# Altium PCB 330 下灯位.PcbDoc (part 5 of 5)
Units mm, origin at the board's own origin, x right, y up, seen from the top; angles counter-clockwise.
Board outline 301.8 x 92.3 mm, 2 copper layers (Top, Bottom), stack 0.323 mm thick; 298 components, 203 nets, 2190 pads, 758 vias.
Unrouted connection lines stored in the file: 36.
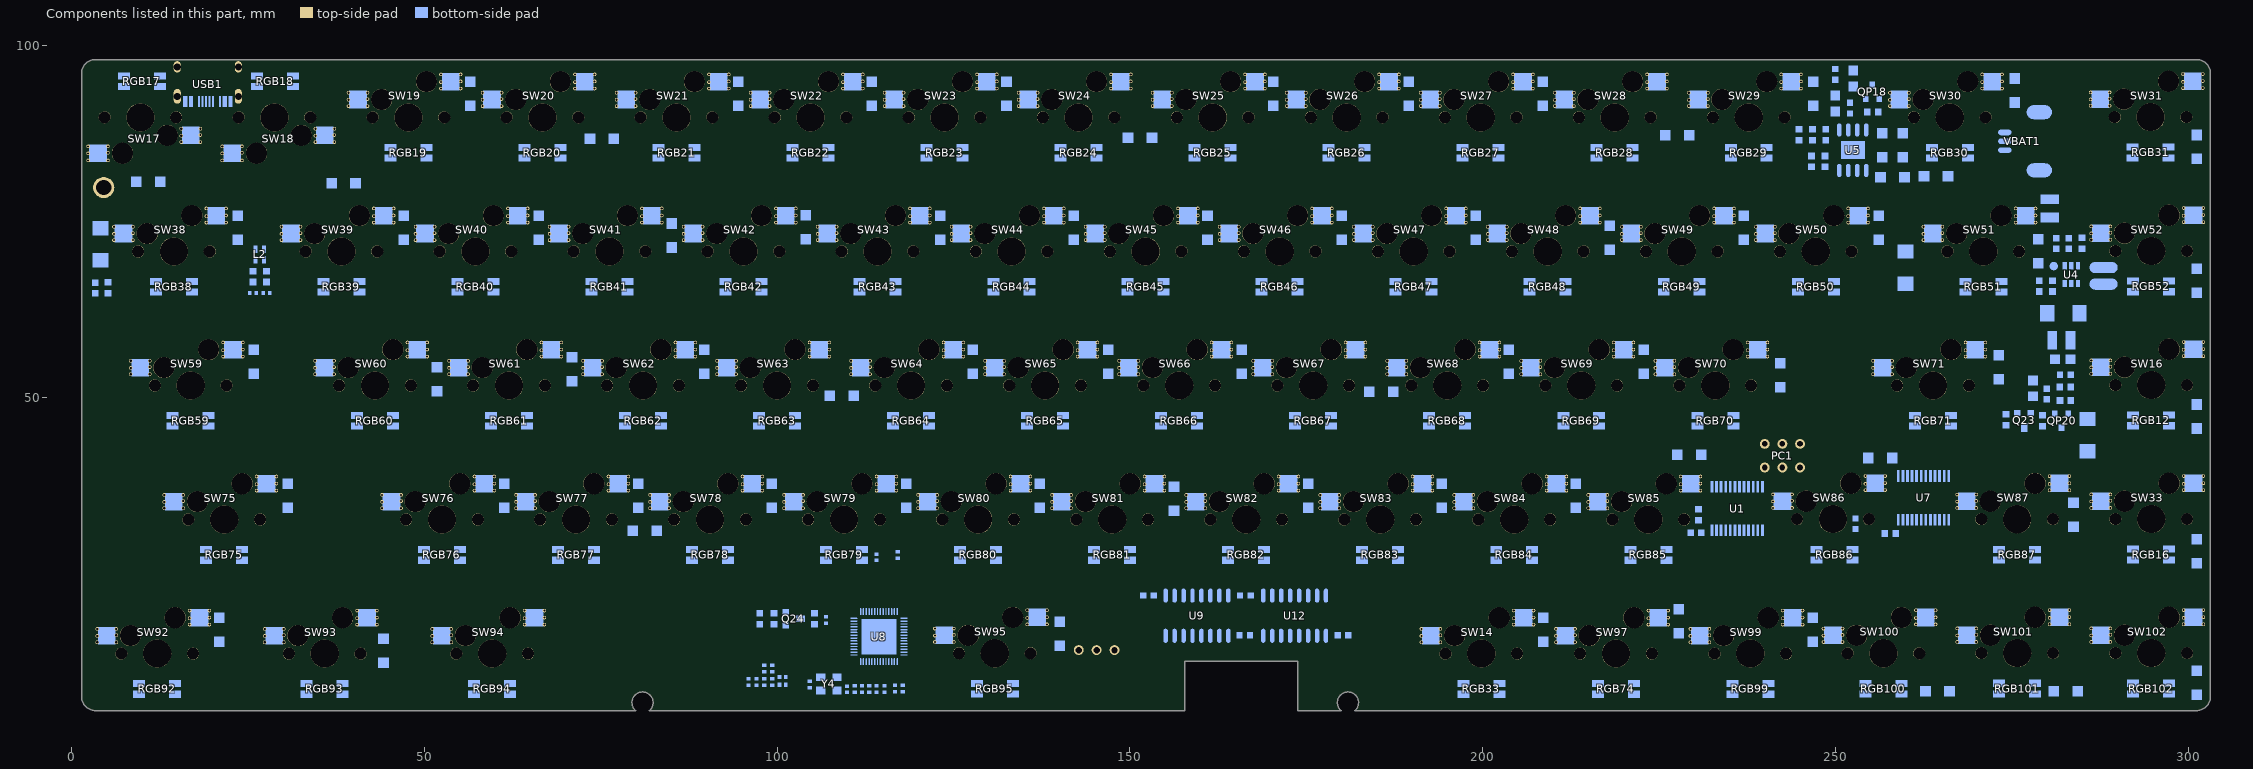
[diagram p5: the components of this part, seen from the top]

## Keep-outs
Keep-Out Layer:
  circle w0.013: c-1.905,79.502 r2.5
  circle w0.013: c-1.905,79.502 r1.15
  circle w0.013: c28.786,89.795 r2
  circle w0.013: c9.786,89.795 r2
  circle w0.013: c275.786,13.795 r2
  circle w0.013: c275.786,13.795 r2
  circle w0.013: c199.815,-82.75 r2.5
  circle w0.013: c103.815,-92.25 r2.5
  circle w0.013: c138.07,-63.05 r2.5
  circle w0.013: c199.315,-12.25 r2.5
  circle w0.013: c142.815,-25.25 r2.5
  circle w0.013: c66.815,-25.25 r2.5
  circle w0.013: c18.445,-92.25 r2.5
  circle w0.013: c62.07,-63.05 r2.5
  circle w0.013: c-61.43,-87.25 r2.5
  circle w0.013: c-13.93,-63.05 r2.5
  circle w0.013: c-9.185,-25.25 r2.5
  circle w0.013: c-80.935,-26.25 r2.5
  circle w0.013: c211.609,-217.481 r1.15
  circle w0.013: c164.109,-226.981 r2
  circle w0.013: c183.109,-226.981 r2
  circle w0.013: c202.109,-226.981 r2
  circle w0.013: c221.109,-226.981 r2
  circle w0.013: c211.609,-227.981 r2.25
  circle w0.013: c154.609,-227.981 r2.25
  circle w0.013: c211.609,-217.481 r2.5
  circle w0.013: c178.359,-188.981 r2
  circle w0.013: c159.364,-188.981 r2
  circle w0.013: c190.239,-188.981 r2
  circle w0.013: c221.109,-188.981 r2
  circle w0.013: c221.109,-207.981 r2
  circle w0.013: c202.109,-207.981 r2
  circle w0.013: c175.994,-207.981 r2
  circle w0.013: c115.609,-226.981 r1.15
  circle w0.013: c107.239,-218.631 r2
  circle w0.013: c126.109,-226.981 r2
  circle w0.013: c145.109,-226.981 r2
  circle w0.013: c78.609,-226.481 r2.25
  circle w0.013: c115.609,-226.981 r2.5
  circle w0.013: c83.359,-188.981 r2
  circle w0.013: c102.364,-188.981 r2
  circle w0.013: c121.364,-188.981 r2
  circle w0.013: c140.364,-188.981 r2
  circle w0.013: c149.864,-207.981 r2
  circle w0.013: c130.864,-207.981 r2
  circle w0.013: c111.864,-207.981 r2
  circle w0.013: c92.864,-207.981 r2
  circle w0.013: c149.864,-197.781 r2.5
  circle w0.013: c199.736,-179.481 r2
  circle w0.013: c154.609,-169.981 r2
  circle w0.013: c173.609,-169.981 r2
  circle w0.013: c197.359,-169.981 r2
  circle w0.013: c221.109,-169.981 r2
  circle w0.013: c211.109,-146.981 r1.15
  circle w0.013: c154.609,-159.981 r1.15
  circle w0.013: c221.109,-150.981 r2
  circle w0.013: c192.609,-150.981 r2
  circle w0.013: c164.109,-150.981 r2
  circle w0.013: c154.609,-149.981 r2.25
  circle w0.013: c211.109,-146.981 r2.5
  circle w0.013: c154.609,-159.981 r2.5
  circle w0.013: c78.609,-169.981 r2
  circle w0.013: c97.609,-169.981 r2
  circle w0.013: c116.609,-169.981 r2
  circle w0.013: c135.609,-169.981 r2
  circle w0.013: c111.864,-184.981 r2.25
  circle w0.013: c78.609,-159.981 r1.15
  circle w0.013: c145.109,-150.981 r2
  circle w0.013: c126.109,-150.981 r2
  circle w0.013: c107.109,-150.981 r2
  circle w0.013: c88.109,-150.981 r2
  circle w0.013: c78.609,-149.981 r2.25
  circle w0.013: c78.609,-159.981 r2.5
  circle w0.013: c30.239,-226.981 r1.15
  circle w0.013: c7.239,-218.631 r2
  circle w0.013: c57.239,-226.981 r2
  circle w0.013: c20.239,-227.981 r2.25
  circle w0.013: c30.239,-226.981 r2.5
  circle w0.013: c73.864,-197.781 r1.5
  circle w0.013: c26.364,-188.981 r2
  circle w0.013: c7.364,-188.981 r2
  circle w0.013: c45.364,-188.981 r2
  circle w0.013: c64.364,-188.981 r2
  circle w0.013: c73.864,-207.981 r2
  circle w0.013: c54.864,-207.981 r2
  circle w0.013: c35.864,-207.981 r2
  circle w0.013: c16.864,-207.981 r2
  circle w0.013: c73.864,-197.781 r2.5
  circle w0.013: c-49.636,-221.981 r1.15
  circle w0.013: c-61.511,-226.981 r2
  circle w0.013: c-37.761,-226.981 r2
  circle w0.013: c-14.011,-226.981 r2
  circle w0.013: c-49.636,-227.981 r2.25
  circle w0.013: c-49.636,-221.981 r2.5
  circle w0.013: c-61.511,-207.981 r2
  circle w0.013: c-40.141,-207.981 r2
  circle w0.013: c-52.011,-207.981 r2
  circle w0.013: c-11.636,-188.981 r2
  circle w0.013: c-30.636,-188.981 r2
  circle w0.013: c-56.761,-188.981 r2
  circle w0.013: c-2.136,-207.981 r2
  circle w0.013: c-21.136,-207.981 r2
  circle w0.013: c-2.136,-197.781 r2.5
  circle w0.013: c21.609,-169.981 r2
  circle w0.013: c40.609,-169.981 r2
  circle w0.013: c59.609,-169.981 r2
  circle w0.013: c2.609,-169.981 r2
  circle w0.013: c35.864,-184.981 r2.25
  circle w0.013: c2.609,-159.981 r1.15
  circle w0.013: c69.109,-150.981 r2
  circle w0.013: c50.109,-150.981 r2
  circle w0.013: c31.109,-150.981 r2
  circle w0.013: c12.109,-150.981 r2
  circle w0.013: c2.609,-149.981 r2.25
  circle w0.013: c2.609,-159.981 r2.5
  circle w0.013: c-59.141,-169.981 r2
  circle w0.013: c-35.391,-169.981 r2
  circle w0.013: c-16.391,-169.981 r2
  circle w0.013: c-54.391,-152.331 r1.15
  circle w0.013: c-69.141,-160.981 r1.15
  circle w0.013: c-6.891,-150.981 r2
  circle w0.013: c-25.891,-150.981 r2
  circle w0.013: c-44.891,-150.981 r2
  circle w0.013: c-63.891,-150.981 r2
  circle w0.013: c-69.141,-160.981 r2.5
  circle w0.013: c199.315,-12.25 r1.15
  circle w0.013: c142.815,-25.25 r1.15
  circle w0.013: c209.315,-16.25 r2
  circle w0.013: c180.815,-16.25 r2
  circle w0.013: c152.315,-16.25 r2
  circle w0.013: c142.815,-15.25 r2.25
  circle w0.013: c142.815,-35.25 r2
  circle w0.013: c161.815,-35.25 r2
  circle w0.013: c185.565,-35.25 r2
  circle w0.013: c209.315,-35.25 r2
  circle w0.013: c187.943,-44.75 r2
  circle w0.013: c66.815,-25.25 r1.15
  circle w0.013: c133.315,-16.25 r2
  circle w0.013: c114.315,-16.25 r2
  circle w0.013: c95.315,-16.25 r2
  circle w0.013: c76.315,-16.25 r2
  circle w0.013: c66.815,-15.25 r2.25
  circle w0.013: c66.815,-35.25 r2
  circle w0.013: c85.815,-35.25 r2
  circle w0.013: c104.815,-35.25 r2
  circle w0.013: c123.815,-35.25 r2
  circle w0.013: c100.07,-50.25 r2.25
  circle w0.013: c181.315,-69.25 r0.45
  circle w0.013: c178.315,-69.25 r0.45
  circle w0.013: c147.57,-54.25 r2
  circle w0.013: c178.445,-54.25 r2
  circle w0.013: c209.315,-54.25 r2
  circle w0.013: c209.315,-73.25 r2
  circle w0.013: c190.315,-73.25 r2
  circle w0.013: c164.2,-73.25 r2
  circle w0.013: c166.565,-54.25 r2
  circle w0.013: c199.815,-82.75 r1.15
  circle w0.013: c152.315,-92.25 r2
  circle w0.013: c171.315,-92.25 r2
  circle w0.013: c190.315,-92.25 r2
  circle w0.013: c209.315,-92.25 r2
  circle w0.013: c142.815,-93.25 r2.25
  circle w0.013: c199.815,-93.25 r2.25
  circle w0.013: c71.565,-54.25 r2
  circle w0.013: c90.57,-54.25 r2
  circle w0.013: c109.57,-54.25 r2
  circle w0.013: c128.57,-54.25 r2
  circle w0.013: c138.07,-73.25 r2
  circle w0.013: c119.07,-73.25 r2
  circle w0.013: c100.07,-73.25 r2
  circle w0.013: c81.07,-73.25 r2
  circle w0.013: c103.815,-92.25 r1.15
  circle w0.013: c114.315,-92.25 r2
  circle w0.013: c133.315,-92.25 r2
  circle w0.013: c95.445,-83.9 r2
  circle w0.013: c66.815,-91.75 r2.25
  circle w0.013: c-9.185,-25.25 r1.15
  circle w0.013: c57.315,-16.25 r2
  circle w0.013: c38.315,-16.25 r2
  circle w0.013: c19.315,-16.25 r2
  circle w0.013: c0.315,-16.25 r2
  circle w0.013: c-9.185,-15.25 r2.25
  circle w0.013: c9.815,-35.25 r2
  circle w0.013: c28.815,-35.25 r2
  circle w0.013: c47.815,-35.25 r2
  circle w0.013: c-9.185,-35.25 r2
  circle w0.013: c24.07,-50.25 r2.25
  circle w0.013: c-66.185,-17.6 r1.15
  circle w0.013: c-80.935,-26.25 r1.15
  circle w0.013: c-18.685,-16.25 r2
  circle w0.013: c-37.685,-16.25 r2
  circle w0.013: c-56.685,-16.25 r2
  circle w0.013: c-75.685,-16.25 r2
  circle w0.013: c-70.935,-35.25 r2
  circle w0.013: c-47.185,-35.25 r2
  circle w0.013: c-28.185,-35.25 r2
  circle w0.013: c62.07,-63.05 r1.5
  circle w0.013: c14.57,-54.25 r2
  circle w0.013: c-4.43,-54.25 r2
  circle w0.013: c33.57,-54.25 r2
  circle w0.013: c52.57,-54.25 r2
  circle w0.013: c62.07,-73.25 r2
  circle w0.013: c43.07,-73.25 r2
  circle w0.013: c24.07,-73.25 r2
  circle w0.013: c5.07,-73.25 r2
  circle w0.013: c18.445,-92.25 r1.15
  circle w0.013: c45.445,-92.25 r2
  circle w0.013: c-4.555,-83.9 r2
  circle w0.013: c8.445,-93.25 r2.25
  circle w0.013: c-23.43,-54.25 r2
  circle w0.013: c-42.43,-54.25 r2
  circle w0.013: c-68.555,-54.25 r2
  circle w0.013: c-13.93,-73.25 r2
  circle w0.013: c-32.93,-73.25 r2
  circle w0.013: c-63.805,-73.25 r2
  circle w0.013: c-51.935,-73.25 r2
  circle w0.013: c-73.305,-73.25 r2
  circle w0.013: c-61.43,-87.25 r1.15
  circle w0.013: c-73.305,-92.25 r2
  circle w0.013: c-49.555,-92.25 r2
  circle w0.013: c-25.805,-92.25 r2
  circle w0.013: c-61.43,-93.25 r2.25
  circle w0.013: c273.414,61.295 r2
  circle w0.013: c294.786,51.795 r2
  circle w0.013: c263.916,51.795 r2
  circle w0.013: c214.041,51.795 r2
  circle w0.013: c233.041,51.795 r2
  circle w0.013: c223.541,42.995 r2.5
  circle w0.013: c176.041,51.795 r2
  circle w0.013: c152.286,90.795 r2.25
  circle w0.013: c157.036,51.795 r2
  circle w0.013: c147.541,42.995 r2.5
  circle w0.013: c119.041,51.795 r2
  circle w0.013: c76.286,90.795 r2.25
  circle w0.013: c100.041,51.795 r2
  circle w0.013: c93.916,12.795 r2.25
  circle w0.013: c43.041,51.795 r2
  circle w0.013: c62.041,51.795 r2
  circle w0.013: c294.786,89.795 r2
  circle w0.013: c271.036,70.795 r2
  circle w0.013: c294.786,70.795 r2
  circle w0.013: c294.786,32.795 r2
  circle w0.013: c294.786,13.795 r2
  circle w0.013: c237.786,89.795 r2
  circle w0.013: c247.286,70.795 r2
  circle w0.013: c237.786,13.795 r2
  circle w0.013: c256.786,13.795 r2
  circle w0.013: c223.541,32.795 r2
  circle w0.013: c180.786,89.795 r2
  circle w0.013: c199.786,89.795 r2
  circle w0.013: c190.286,70.795 r2
  circle w0.013: c180.916,22.145 r2
  circle w0.013: c189.286,13.795 r2.5
  circle w0.013: c199.786,13.795 r2
  circle w0.013: c142.786,89.795 r2
  circle w0.013: c152.286,80.795 r2.5
  circle w0.013: c166.541,32.795 r2
  circle w0.013: c152.286,14.295 r2.25
  circle w0.013: c123.786,89.795 r2
  circle w0.013: c133.286,70.795 r2
  circle w0.013: c109.541,55.795 r2.25
  circle w0.013: c109.541,32.795 r2
  circle w0.013: c85.786,89.795 r2
  circle w0.013: c76.286,80.795 r2.5
  circle w0.013: c76.286,80.795 r1.15
  circle w0.013: c76.286,70.795 r2
  circle w0.013: c66.786,89.795 r2
  circle w0.013: c52.541,32.795 r2
  circle w0.013: c59.666,13.795 r2
  circle w0.013: c28.786,89.795 r2
  circle w0.013: c19.286,88.445 r1.15
  circle w0.013: c21.666,32.795 r2
  circle w0.013: c12.166,32.795 r2
  circle w0.013: c35.916,13.795 r2
  circle w0.013: c12.166,13.795 r2
  circle w0.013: c284.786,93.795 r2.5
  circle w0.013: c285.286,12.795 r2.25
  circle w0.013: c252.036,51.795 r2
  circle w0.013: c228.286,90.795 r2.25
  circle w0.013: c228.286,12.795 r2.25
  circle w0.013: c195.041,51.795 r2
  circle w0.013: c147.541,42.995 r1.5
  circle w0.013: c138.041,51.795 r2
  circle w0.013: c81.041,51.795 r2
  circle w0.013: c71.541,42.995 r2.5
  circle w0.013: c24.041,12.795 r2.25
  circle w0.013: c24.041,18.795 r2.5
  circle w0.013: c24.041,18.795 r1.15
  circle w0.013: c16.916,51.795 r2
  circle w0.013: c284.786,93.795 r1.15
  circle w0.013: c285.286,23.295 r1.15
  circle w0.013: c285.286,23.295 r2.5
  circle w0.013: c275.786,32.795 r2
  circle w0.013: c266.286,89.795 r2
  circle w0.013: c249.671,32.795 r2
  circle w0.013: c228.286,80.795 r1.15
  circle w0.013: c228.286,80.795 r2.5
  circle w0.013: c228.286,70.795 r2
  circle w0.013: c218.786,89.795 r2
  circle w0.013: c218.786,13.795 r2
  circle w0.013: c209.286,70.795 r2
  circle w0.013: c204.541,32.795 r2
  circle w0.013: c185.541,55.795 r2.25
  circle w0.013: c185.541,32.795 r2
  circle w0.013: c189.286,13.795 r1.15
  circle w0.013: c171.286,70.795 r2
  circle w0.013: c161.786,89.795 r2
  circle w0.013: c152.286,80.795 r1.15
  circle w0.013: c152.286,70.795 r2
  circle w0.013: c147.541,32.795 r2
  circle w0.013: c128.541,32.795 r2
  circle w0.013: c130.916,13.795 r2
  circle w0.013: c114.286,70.795 r2
  circle w0.013: c104.786,89.795 r2
  circle w0.013: c103.916,13.795 r2.5
  circle w0.013: c103.916,13.795 r1.15
  circle w0.013: c95.286,70.795 r2
  circle w0.013: c90.541,32.795 r2
  circle w0.013: c80.916,22.145 r2
  circle w0.013: c71.541,32.795 r2
  circle w0.013: c57.286,70.795 r2
  circle w0.013: c47.786,89.795 r2
  circle w0.013: c38.286,70.795 r2
  circle w0.013: c33.536,32.795 r2
  circle w0.013: c14.536,70.795 r2
  circle w0.013: c9.786,89.795 r2
  region: 256.964,-111.286 253.464,-110.703 256.964,-110.12
  region: 251.864,-110.703 248.364,-111.286 248.364,-110.12
  lines w0.013: -82.085,-124.34 -82.085,-122.74 ; -72.291,-217.781 -70.091,-217.781 -70.091,-216.981 -72.291,-216.981 ; -72.291,-198.781 -69.391,-198.781 -69.391,-197.981 -72.291,-197.981 ; -72.291,-179.981 -69.391,-179.981 -69.391,-179.181 -72.291,-179.181 ; -70.685,-122.74 -70.685,-120.74 cw(c-69.385,-120.74) -69.385,-119.44 -62.985,-119.44 cw(c-62.985,-120.74) -61.685,-120.74 -61.685,-122.74 ; -70.685,-121.44 ccw(c-69.385,-121.44) -69.385,-122.74 -62.985,-122.74 ccw(c-62.985,-121.44) -61.685,-121.44 ; -70.685,-12.74 -70.685,-14 -70.301,-14 ; -70.685,-9.7 -70.685,-8.621 ; -70.685,-9.1 -70.205,-9.1 ; -70.685,-8.1 -70.685,-6.6 -61.685,-6.6 -61.685,-8.1 ; -69.385,-8.1 -69.385,-6.6 ; -68.585,-121.39 -68.585,-120.79 ; -63.785,-121.39 -63.785,-120.79 ; -62.985,-8.1 -62.985,-6.6 ; -62.165,-9.1 -61.685,-9.1 ; -62.069,-14 -61.685,-14 -61.685,-12.74 ; -61.685,-9.7 -61.685,-8.62 ; -58.896,-143.345 ccw(c-58.711,-143.581) -59.011,-143.581 -59.011,-144.191 ccw(c-58.711,-144.191) -58.891,-144.431 ; -58.891,-147.471 ccw(c-58.711,-147.711) -59.011,-147.711 -59.011,-148.511 ccw(c-58.711,-148.511) -58.507,-148.731 ; -58.891,-142.831 -70.291,-142.831 ccw(c-70.291,-144.831) -72.291,-144.831 -72.291,-233.131 ccw(c-70.291,-233.131) -70.291,-235.131 6.276,-235.131 cw(c7.239,-233.981) 8.202,-235.131 84.109,-235.131 84.109,-228.131 100.109,-228.131 100.109,-235.131 106.276,-235.131 cw(c107.239,-233.981) 108.202,-235.131 227.509,-235.131 ccw(c227.509,-233.131) 229.509,-233.131 229.509,-144.831 ccw(c227.509,-144.831) 227.509,-142.831 -49.891,-142.831 ; -57.591,-148.731 -57.591,-141.331 ; -51.191,-148.731 -51.191,-141.331 ; -50.275,-148.731 ccw(c-50.071,-148.511) -50.156,-148.799 ; -50.191,-235.131 -50.191,-230.161 ; -49.891,-147.471 cw(c-50.071,-147.711) -49.771,-147.711 -49.771,-148.511 ; -49.891,-144.431 ccw(c-50.071,-144.191) -49.771,-144.191 -49.771,-143.581 ccw(c-50.071,-143.581) -49.886,-143.345 ; -49.391,-235.131 -49.391,-230.218 ; -49.341,-161.581 -51.851,-161.581 -51.851,-162.381 -49.307,-162.381 ; -47.291,-164.355 -47.291,-166.941 -46.491,-166.941 -46.491,-164.338 ; -44.575,-162.381 -41.931,-162.381 -41.931,-161.581 -44.541,-161.581 ; -35.691,-142.831 -35.691,-145.981 -34.891,-145.981 -34.891,-142.831 ; -28.281,-219.381 -30.851,-219.381 -30.851,-218.581 -28.247,-218.581 ; -26.291,-222.346 -26.291,-223.941 -25.491,-223.941 -25.491,-222.349 ; -23.536,-181.381 -26.051,-181.381 -26.051,-180.581 -23.502,-180.581 ; -23.515,-218.581 -20.931,-218.581 -20.931,-219.381 -23.481,-219.381 ; -21.491,-184.355 -21.491,-185.941 -20.691,-185.941 -20.691,-184.339 ; -18.77,-180.581 -16.131,-180.581 -16.131,-181.381 -18.736,-181.381 ; 13.809,-235.131 13.809,-231.481 14.609,-231.481 14.609,-235.131 ; 14.786,93.305 14.786,92.045 15.17,92.045 ; 14.786,96.345 14.786,97.424 ; 14.786,96.945 15.266,96.945 ; 21.309,-142.831 21.309,-145.981 22.109,-145.981 22.109,-142.831 ; 23.306,96.945 23.786,96.945 ; 23.402,92.045 23.786,92.045 23.786,93.305 ; 23.786,96.345 23.786,97.425 ; 69.809,-235.131 69.809,-231.481 70.609,-231.481 70.609,-235.131 ; 78.209,-147.767 78.209,-142.831 ; 79.009,-147.767 79.009,-142.831 ; 135.109,-142.831 135.109,-145.981 135.909,-145.981 135.909,-142.831 ; 152.29,-122.74 152.29,-119.24 161.34,-119.24 161.34,-122.74 ; 154.109,-235.131 154.109,-230.175 ; 154.909,-235.131 154.909,-230.211 ; 156.065,-119.24 156.065,-117.24 157.565,-117.24 157.565,-119.24 ; 166.464,-181.381 163.949,-181.381 163.949,-180.581 166.498,-180.581 ; 168.509,-184.355 168.509,-185.941 169.309,-185.941 169.309,-184.339 ; 169.715,-122.74 169.715,-120.74 175.215,-120.74 175.215,-122.74 ; 171.23,-180.581 173.869,-180.581 173.869,-181.381 171.264,-181.381 ; 176.415,-122.74 176.415,-121.34 183.215,-121.34 183.215,-122.74 ; 187.009,-162.281 188.009,-162.281 188.009,-161.881 187.009,-161.881 ; 190.209,-219.381 187.649,-219.381 187.649,-218.581 190.243,-218.581 ; 190.959,-202.581 190.959,-201.081 192.259,-201.081 192.259,-202.581 ; 192.209,-222.347 192.209,-223.941 193.009,-223.941 193.009,-222.347 ; 192.209,-216.615 192.209,-214.021 193.009,-214.021 193.009,-216.615 ; 194.975,-218.581 197.569,-218.581 197.569,-219.381 195.009,-219.381 ; 208.709,-161.581 206.849,-161.581 206.849,-162.381 208.743,-162.381 ; 211.109,-235.131 211.109,-230.175 ; 211.109,-142.831 211.109,-144.181 211.909,-144.181 211.909,-142.831 ; 211.409,-164.362 211.409,-166.941 212.209,-166.941 212.209,-164.114 ; 211.409,-158.6 211.409,-157.021 212.209,-157.021 212.209,-158.848 ; 211.909,-235.131 211.909,-230.211 ; 213.475,-162.381 216.769,-162.381 216.769,-161.581 213.509,-161.581 ; 215.715,-124.34 215.715,-122.74 ; 229.509,-217.781 227.309,-217.781 227.309,-216.981 229.509,-216.981 ; 229.509,-198.781 226.609,-198.781 226.609,-197.981 229.509,-197.981 ; 229.509,-179.981 226.609,-179.981 226.609,-179.181 229.509,-179.181 ; 229.509,-160.981 226.609,-160.981 226.609,-160.181 229.509,-160.181 ; 244.864,-110.703 248.364,-110.703 ; 248.364,-65 246.364,-65 246.364,-63.5 248.364,-63.5 ; 249.864,-14 249.864,-6.6 ; 250.564,-67.85 250.564,-66.35 251.664,-66.35 251.664,-67.85 ; 250.564,-6.6 250.564,-9.1 251.864,-9.1 ; 251.864,-111.703 251.864,-100.4 ; 251.864,-98.4 253.464,-98.4 ; 251.864,-70.65 250.464,-70.65 250.464,-67.85 251.864,-67.85 ; 251.864,-66 248.364,-66 248.364,-62.5 251.864,-62.5 ; 251.864,-30.6 249.864,-30.6 249.864,-21.6 251.864,-21.6 ; 251.864,-14 248.564,-14 248.564,-6.6 251.864,-6.6 251.864,-8.1 ; 251.864,-10.1 253.464,-10.1 ; 253.464,-111.703 253.464,-100.4 ; 256.964,-110.703 260.464,-110.703 ; 1.386,7.645 ccw(c3.386,7.645) 3.386,5.645 ; 1.386,7.645 ccw(c3.386,7.645) 3.386,5.645 ; 1.386,7.645 1.386,95.945 ; 1.386,95.945 cw(c3.386,95.945) 3.386,97.945 ; 1.386,95.945 cw(c3.386,95.945) 3.386,97.945 ; 3.386,5.645 79.953,5.645 cw(c80.916,6.795) 81.879,5.645 157.786,5.645 157.786,12.645 173.786,12.645 173.786,5.645 179.953,5.645 cw(c180.916,6.795) 181.879,5.645 301.186,5.645 ccw(c301.186,7.645) 303.186,7.645 303.186,95.945 ccw(c301.186,95.945) 301.186,97.945 3.386,97.945 ; 8.251,93.312 11.52,93.312 ; 8.251,93.312 11.52,93.312 ; 8.251,93.312 8.251,96.404 ; 8.251,93.312 8.251,96.404 ; 8.251,96.404 11.52,96.404 ; 8.251,96.404 11.52,96.404 ; 10.287,7.112 13.587,7.112 ; 10.287,7.112 13.587,7.112 ; 10.287,7.112 10.287,10.188 ; 10.287,7.112 10.287,10.188 ; 10.287,10.188 13.587,10.188 ; 10.287,10.188 13.587,10.188 ; 11.52,93.312 11.52,96.404 ; 11.52,93.312 11.52,96.404 ; 12.803,64.185 12.803,67.278 ; 12.803,64.185 12.803,67.278 ; 12.803,64.185 16.071,64.185 ; 12.803,64.185 16.071,64.185 ; 12.803,67.278 16.071,67.278 ; 12.803,67.278 16.071,67.278 ; 13.587,7.112 13.587,10.188 ; 13.587,7.112 13.587,10.188 ; 14.786,97.945 14.786,99.445 ; 14.786,97.945 14.786,99.445 ; 14.786,97.945 14.786,99.445 ; 14.786,99.445 23.786,99.445 ; 14.786,99.445 23.786,99.445 ; 14.786,99.445 23.786,99.445 ; 15.23,45.177 18.499,45.177 ; 15.23,45.177 18.499,45.177 ; 15.23,45.177 15.23,48.27 ; 15.23,45.177 15.23,48.27 ; 15.23,48.27 18.499,48.27 ; 15.23,48.27 18.499,48.27 ; 16.071,64.185 16.071,67.278 ; 16.071,64.185 16.071,67.278 ; 16.086,97.945 16.086,99.445 ; 16.086,97.945 16.086,99.445 ; 16.086,97.945 16.086,99.445 ; 18.499,45.177 18.499,48.27 ; 18.499,45.177 18.499,48.27 ; 19.972,26.14 23.241,26.14 ; 19.972,26.14 23.241,26.14 ; 19.972,26.14 19.972,29.232 ; 19.972,26.14 19.972,29.232 ; 19.972,29.232 23.241,29.232 ; 19.972,29.232 23.241,29.232 ; 22.486,97.945 22.486,99.445 ; 22.486,97.945 22.486,99.445 ; 22.486,97.945 22.486,99.445 ; 23.241,26.14 23.241,29.232 ; 23.241,26.14 23.241,29.232 ; 23.786,97.945 23.786,99.445 ; 23.786,97.945 23.786,99.445 ; 23.786,97.945 23.786,99.445 ; 27.219,93.334 27.219,96.427 ; 27.219,93.334 27.219,96.427 ; 27.219,93.334 30.488,93.334 ; 27.219,93.334 30.488,93.334 ; 27.219,96.427 30.488,96.427 ; 27.219,96.427 30.488,96.427 ; 30.488,93.334 30.488,96.427 ; 30.488,93.334 30.488,96.427 ; 34.265,7.203 37.534,7.203 ; 34.265,7.203 37.534,7.203 ; 34.265,7.203 34.265,10.295 ; 34.265,7.203 34.265,10.295 ; 34.265,10.295 37.534,10.295 ; 34.265,10.295 37.534,10.295 ; 36.535,64.2 39.804,64.2 ; 36.535,64.2 39.804,64.2 ; 36.535,64.2 36.535,67.293 ; 36.535,64.2 36.535,67.293 ; 36.535,67.293 39.804,67.293 ; 36.535,67.293 39.804,67.293 ; 37.534,7.203 37.534,10.295 ; 37.534,7.203 37.534,10.295 ; 39.804,64.2 39.804,67.293 ; 39.804,64.2 39.804,67.293 ; 41.394,45.199 44.662,45.199 ; 41.394,45.199 44.662,45.199 ; 41.394,45.199 41.394,48.291 ; 41.394,45.199 41.394,48.291 ; 41.394,48.291 44.662,48.291 ; 41.394,48.291 44.662,48.291 ; 44.662,45.199 44.662,48.291 ; 44.662,45.199 44.662,48.291 ; 46.1,83.19 49.369,83.19 ; 46.1,83.19 49.369,83.19 ; 46.1,83.19 46.1,86.282 ; 46.1,83.19 46.1,86.282 ; 46.1,86.282 49.369,86.282 ; 46.1,86.282 49.369,86.282 ; 49.369,83.19 49.369,86.282 ; 49.369,83.19 49.369,86.282 ; 50.833,26.14 54.102,26.14 ; 50.833,26.14 54.102,26.14 ; 50.833,26.14 50.833,29.232 ; 50.833,26.14 50.833,29.232 ; 50.833,29.232 54.102,29.232 ; 50.833,29.232 54.102,29.232 ; 54.102,26.14 54.102,29.232 ; 54.102,26.14 54.102,29.232 ; 55.532,64.113 58.801,64.113 ; 55.532,64.113 58.801,64.113 ; 55.532,64.113 55.532,67.205 ; 55.532,64.113 55.532,67.205 ; 55.532,67.205 58.801,67.205 ; 55.532,67.205 58.801,67.205 ; 57.94,7.175 61.209,7.175 ; 57.94,7.175 61.209,7.175 ; 57.94,7.175 57.94,10.268 ; 57.94,7.175 57.94,10.268 ; 57.94,10.268 61.209,10.268 ; 57.94,10.268 61.209,10.268 ; 58.801,64.113 58.801,67.205 ; 58.801,64.113 58.801,67.205 ; 60.369,45.138 63.638,45.138 ; 60.369,45.138 63.638,45.138 ; 60.369,45.138 60.369,48.23 ; 60.369,45.138 60.369,48.23 ; 60.369,48.23 63.638,48.23 ; 60.369,48.23 63.638,48.23 ; 61.209,7.175 61.209,10.268 ; 61.209,7.175 61.209,10.268 ; 63.638,45.138 63.638,48.23 ; 63.638,45.138 63.638,48.23 ; 65.097,83.185 65.097,86.277 ; 65.097,83.185 65.097,86.277 ; 65.097,83.185 68.365,83.185 ; 65.097,83.185 68.365,83.185 ; 65.097,86.277 68.365,86.277 ; 65.097,86.277 68.365,86.277 ; 68.365,83.185 68.365,86.277 ; 68.365,83.185 68.365,86.277 ; 69.883,26.14 73.152,26.14 ; 69.883,26.14 73.152,26.14 ; 69.883,26.14 69.883,29.232 ; 69.883,26.14 69.883,29.232 ; 69.883,29.232 73.152,29.232 ; 69.883,29.232 73.152,29.232 ; 73.152,26.14 73.152,29.232 ; 73.152,26.14 73.152,29.232 ; 74.582,64.113 77.851,64.113 ; 74.582,64.113 77.851,64.113 ; 74.582,64.113 74.582,67.205 ; 74.582,64.113 74.582,67.205 ; 74.582,67.205 77.851,67.205 ; 74.582,67.205 77.851,67.205 ; 77.851,64.113 77.851,67.205 ; 77.851,64.113 77.851,67.205 ; 79.378,45.197 82.647,45.197 ; 79.378,45.197 82.647,45.197 ; 79.378,45.197 79.378,48.29 ; 79.378,45.197 79.378,48.29 ; 79.378,48.29 82.647,48.29 ; 79.378,48.29 82.647,48.29 ; 82.647,45.197 82.647,48.29 ; 82.647,45.197 82.647,48.29 ; 84.084,83.182 84.084,86.275 ; 84.084,83.182 84.084,86.275 ; 84.084,83.182 87.352,83.182 ; 84.084,83.182 87.352,83.182 ; 84.084,86.275 87.352,86.275 ; 84.084,86.275 87.352,86.275 ; 87.352,83.182 87.352,86.275 ; 87.352,83.182 87.352,86.275 ; 88.806,26.14 92.075,26.14 ; 88.806,26.14 92.075,26.14 ; 88.806,26.14 88.806,29.232 ; 88.806,26.14 88.806,29.232 ; 88.806,29.232 92.075,29.232 ; 88.806,29.232 92.075,29.232 ; 92.075,26.14 92.075,29.232 ; 92.075,26.14 92.075,29.232 ; 93.632,64.113 96.901,64.113 ; 93.632,64.113 96.901,64.113 ; 93.632,64.113 93.632,67.205 ; 93.632,64.113 93.632,67.205 ; 93.632,67.205 96.901,67.205 ; 93.632,67.205 96.901,67.205 ; 96.901,64.113 96.901,67.205 ; 96.901,64.113 96.901,67.205 ; 98.347,45.171 101.616,45.171 ; 98.347,45.171 101.616,45.171 ; 98.347,45.171 98.347,48.264 ; 98.347,45.171 98.347,48.264 ; 98.347,48.264 101.616,48.264 ; 98.347,48.264 101.616,48.264 ; 101.616,45.171 101.616,48.264 ; 101.616,45.171 101.616,48.264 ; 103.157,83.163 103.157,86.255 ; 103.157,83.163 103.157,86.255 ; 103.157,83.163 106.426,83.163 ; 103.157,83.163 106.426,83.163 ; 103.157,86.255 106.426,86.255 ; 103.157,86.255 106.426,86.255 ; 106.426,83.163 106.426,86.255 ; 106.426,83.163 106.426,86.255 ; 107.856,26.14 111.125,26.14 ; 107.856,26.14 111.125,26.14 ; 107.856,26.14 107.856,29.232 ; 107.856,26.14 107.856,29.232 ; 107.856,29.232 111.125,29.232 ; 107.856,29.232 111.125,29.232 ; 111.125,26.14 111.125,29.232 ; 111.125,26.14 111.125,29.232 ; 112.555,64.113 115.824,64.113 ; 112.555,64.113 115.824,64.113 ; 112.555,64.113 112.555,67.205 ; 112.555,64.113 112.555,67.205 ; 112.555,67.205 115.824,67.205 ; 112.555,67.205 115.824,67.205 ; 115.824,64.113 115.824,67.205 ; 115.824,64.113 115.824,67.205 ; 117.369,45.184 120.637,45.184 ; 117.369,45.184 120.637,45.184 ; 117.369,45.184 117.369,48.276 ; 117.369,45.184 117.369,48.276 ; 117.369,48.276 120.637,48.276 ; 117.369,48.276 120.637,48.276 ; 120.637,45.184 120.637,48.276 ; 120.637,45.184 120.637,48.276 ; 122.093,83.176 122.093,86.268 ; 122.093,83.176 122.093,86.268 ; 122.093,83.176 125.362,83.176 ; 122.093,83.176 125.362,83.176 ; 122.093,86.268 125.362,86.268 ; 122.093,86.268 125.362,86.268 ; 125.362,83.176 125.362,86.268 ; 125.362,83.176 125.362,86.268 ; 126.906,26.14 130.175,26.14 ; 126.906,26.14 130.175,26.14 ; 126.906,26.14 126.906,29.232 ; 126.906,26.14 126.906,29.232 ; 126.906,29.232 130.175,29.232 ; 126.906,29.232 130.175,29.232 ; 129.319,7.217 132.588,7.217 ; 129.319,7.217 132.588,7.217 ; 129.319,7.217 129.319,10.309 ; 129.319,7.217 129.319,10.309 ; 129.319,10.309 132.588,10.309 ; 129.319,10.309 132.588,10.309 ; 130.175,26.14 130.175,29.232 ; 130.175,26.14 130.175,29.232 ; 131.605,64.113 134.874,64.113 ; 131.605,64.113 134.874,64.113 ; 131.605,64.113 131.605,67.205 ; 131.605,64.113 131.605,67.205 ; 131.605,67.205 134.874,67.205 ; 131.605,67.205 134.874,67.205 ; 132.588,7.217 132.588,10.309 ; 132.588,7.217 132.588,10.309 ; 134.874,64.113 134.874,67.205 ; 134.874,64.113 134.874,67.205 ; 136.387,45.173 136.387,48.266 ; 136.387,45.173 136.387,48.266 ; 136.387,45.173 139.655,45.173 ; 136.387,45.173 139.655,45.173 ; 136.387,48.266 139.655,48.266 ; 136.387,48.266 139.655,48.266 ; 139.655,45.173 139.655,48.266 ; 139.655,45.173 139.655,48.266 ; 141.13,83.163 144.399,83.163 ; 141.13,83.163 144.399,83.163 ; 141.13,83.163 141.13,86.255 ; 141.13,83.163 141.13,86.255 ; 141.13,86.255 144.399,86.255 ; 141.13,86.255 144.399,86.255 ; 144.399,83.163 144.399,86.255 ; 144.399,83.163 144.399,86.255 ; 145.829,26.14 149.098,26.14 ; 145.829,26.14 149.098,26.14 ; 145.829,26.14 145.829,29.232 ; 145.829,26.14 145.829,29.232 ; 145.829,29.232 149.098,29.232 ; 145.829,29.232 149.098,29.232 ; 149.098,26.14 149.098,29.232 ; 149.098,26.14 149.098,29.232 ; 150.528,64.113 153.797,64.113 ; 150.528,64.113 153.797,64.113 ; 150.528,64.113 150.528,67.205 ; 150.528,64.113 150.528,67.205 ; 150.528,67.205 153.797,67.205 ; 150.528,67.205 153.797,67.205 ; 153.797,64.113 153.797,67.205 ; 153.797,64.113 153.797,67.205 ; 155.353,45.177 158.622,45.177 ; 155.353,45.177 158.622,45.177 ; 155.353,45.177 155.353,48.269 ; 155.353,45.177 155.353,48.269 ; 155.353,48.269 158.622,48.269 ; 155.353,48.269 158.622,48.269 ; 158.622,45.177 158.622,48.269 ; 158.622,45.177 158.622,48.269 ; 160.101,83.13 160.101,86.222 ; 160.101,83.13 160.101,86.222 ; 160.101,83.13 163.37,83.13 ; 160.101,83.13 163.37,83.13 ; 160.101,86.222 163.37,86.222 ; 160.101,86.222 163.37,86.222 ; 163.37,83.13 163.37,86.222 ; 163.37,83.13 163.37,86.222 ; 164.879,26.14 168.148,26.14 ; 164.879,26.14 168.148,26.14 ; 164.879,26.14 164.879,29.232 ; 164.879,26.14 164.879,29.232 ; 164.879,29.232 168.148,29.232 ; 164.879,29.232 168.148,29.232 ; 168.148,26.14 168.148,29.232 ; 168.148,26.14 168.148,29.232 ; 169.578,64.113 172.847,64.113 ; 169.578,64.113 172.847,64.113 ; 169.578,64.113 169.578,67.205 ; 169.578,64.113 169.578,67.205 ; 169.578,67.205 172.847,67.205 ; 169.578,67.205 172.847,67.205 ; 172.847,64.113 172.847,67.205 ; 172.847,64.113 172.847,67.205 ; 174.349,45.191 177.618,45.191 ; 174.349,45.191 177.618,45.191 ; 174.349,45.191 174.349,48.283 ; 174.349,45.191 174.349,48.283 ; 174.349,48.283 177.618,48.283 ; 174.349,48.283 177.618,48.283 ; 177.618,45.191 177.618,48.283 ; 177.618,45.191 177.618,48.283 ; 179.135,83.124 179.135,86.216 ; 179.135,83.124 179.135,86.216 ; 179.135,83.124 182.403,83.124 ; 179.135,83.124 182.403,83.124 ; 179.135,86.216 182.403,86.216 ; 179.135,86.216 182.403,86.216 ; 182.403,83.124 182.403,86.216 ; 182.403,83.124 182.403,86.216 ; 183.865,26.135 187.133,26.135 ; 183.865,26.135 187.133,26.135 ; 183.865,26.135 183.865,29.227 ; 183.865,26.135 183.865,29.227 ; 183.865,29.227 187.133,29.227 ; 183.865,29.227 187.133,29.227 ; 187.133,26.135 187.133,29.227 ; 187.133,26.135 187.133,29.227 ; 188.628,64.113 191.897,64.113 ; 188.628,64.113 191.897,64.113 ; 188.628,64.113 188.628,67.205 ; 188.628,64.113 188.628,67.205 ; 188.628,67.205 191.897,67.205 ; 188.628,67.205 191.897,67.205 ; 191.897,64.113 191.897,67.205 ; 191.897,64.113 191.897,67.205 ; 193.345,45.177 196.613,45.177 ; 193.345,45.177 196.613,45.177 ; 193.345,45.177 193.345,48.269 ; 193.345,45.177 193.345,48.269 ; 193.345,48.269 196.613,48.269 ; 193.345,48.269 196.613,48.269 ; 196.613,45.177 196.613,48.269 ; 196.613,45.177 196.613,48.269 ; 198.23,7.17 201.499,7.17 ; 198.23,7.17 201.499,7.17 ; 198.23,7.17 198.23,10.262 ; 198.23,7.17 198.23,10.262 ; 198.23,10.262 201.499,10.262 ; 198.23,10.262 201.499,10.262 ; 201.499,7.17 201.499,10.262 ; 201.499,7.17 201.499,10.262 ; 202.852,26.14 206.121,26.14 ; 202.852,26.14 206.121,26.14 ; 202.852,26.14 202.852,29.232 ; 202.852,26.14 202.852,29.232 ; 202.852,29.232 206.121,29.232 ; 202.852,29.232 206.121,29.232 ; 206.121,26.14 206.121,29.232 ; 206.121,26.14 206.121,29.232 ; 207.551,64.113 210.82,64.113 ; 207.551,64.113 210.82,64.113 ; 207.551,64.113 207.551,67.205 ; 207.551,64.113 207.551,67.205 ; 207.551,67.205 210.82,67.205 ; 207.551,67.205 210.82,67.205 ; 210.82,64.113 210.82,67.205 ; 210.82,64.113 210.82,67.205 ; 212.344,45.172 215.613,45.172 ; 212.344,45.172 215.613,45.172 ; 212.344,45.172 212.344,48.265 ; 212.344,45.172 212.344,48.265 ; 212.344,48.265 215.613,48.265 ; 212.344,48.265 215.613,48.265 ; 215.613,45.172 215.613,48.265 ; 215.613,45.172 215.613,48.265 ; 217.267,7.17 220.535,7.17 ; 217.267,7.17 220.535,7.17 ; 217.267,7.17 217.267,10.262 ; 217.267,7.17 217.267,10.262 ; 217.267,10.262 220.535,10.262 ; 217.267,10.262 220.535,10.262 ; 220.535,7.17 220.535,10.262 ; 220.535,7.17 220.535,10.262 ; 221.858,26.133 225.127,26.133 ; 221.858,26.133 225.127,26.133 ; 221.858,26.133 221.858,29.226 ; 221.858,26.133 221.858,29.226 ; 221.858,29.226 225.127,29.226 ; 221.858,29.226 225.127,29.226 ; 225.127,26.133 225.127,29.226 ; 225.127,26.133 225.127,29.226 ; 226.601,64.24 229.87,64.24 ; 226.601,64.24 229.87,64.24 ; 226.601,64.24 226.601,67.332 ; 226.601,64.24 226.601,67.332 ; 226.601,67.332 229.87,67.332 ; 226.601,67.332 229.87,67.332 ; 229.87,64.24 229.87,67.332 ; 229.87,64.24 229.87,67.332 ; 231.425,45.141 234.693,45.141 ; 231.425,45.141 234.693,45.141 ; 231.425,45.141 231.425,48.233 ; 231.425,45.141 231.425,48.233 ; 231.425,48.233 234.693,48.233 ; 231.425,48.233 234.693,48.233 ; 234.693,45.141 234.693,48.233 ; 234.693,45.141 234.693,48.233 ; 236.38,7.09 239.649,7.09 ; 236.38,7.09 239.649,7.09 ; 236.38,7.09 236.38,10.182 ; 236.38,7.09 236.38,10.182 ; 236.38,10.182 239.649,10.182 ; 236.38,10.182 239.649,10.182 ; 239.649,7.09 239.649,10.182 ; 239.649,7.09 239.649,10.182 ; 245.651,64.113 248.92,64.113 ; 245.651,64.113 248.92,64.113 ; 245.651,64.113 245.651,67.205 ; 245.651,64.113 245.651,67.205 ; 245.651,67.205 248.92,67.205 ; 245.651,67.205 248.92,67.205 ; 248.326,26.264 251.594,26.264 ; 248.326,26.264 251.594,26.264 ; 248.326,26.264 248.326,29.356 ; 248.326,26.264 248.326,29.356 ; 248.326,29.356 251.594,29.356 ; 248.326,29.356 251.594,29.356 ; 248.92,64.113 248.92,67.205 ; 248.92,64.113 248.92,67.205 ; 251.594,26.264 251.594,29.356 ; 251.594,26.264 251.594,29.356 ; 251.864,-100.4 251.864,-8.1 ; 251.864,-100.4 253.464,-100.4 ; 251.864,-8.1 253.464,-8.1 253.464,-100.4 ; 255.176,7.217 258.445,7.217 ; 255.176,7.217 258.445,7.217 ; 255.176,7.217 255.176,10.309 ; 255.176,7.217 255.176,10.309 ; 255.176,10.309 258.445,10.309 ; 255.176,10.309 258.445,10.309 ; 258.445,7.217 258.445,10.309 ; 258.445,7.217 258.445,10.309 ; 262.258,45.171 265.527,45.171 ; 262.258,45.171 265.527,45.171 ; 262.258,45.171 262.258,48.263 ; 262.258,45.171 262.258,48.263 ; 262.258,48.263 265.527,48.263 ; 262.258,48.263 265.527,48.263 ; 265.527,45.171 265.527,48.263 ; 265.527,45.171 265.527,48.263 ; 269.4,64.113 272.669,64.113 ; 269.4,64.113 272.669,64.113 ; 269.4,64.113 269.4,67.205 ; 269.4,64.113 269.4,67.205 ; 269.4,67.205 272.669,67.205 ; 269.4,67.205 272.669,67.205 ; 272.669,64.113 272.669,67.205 ; 272.669,64.113 272.669,67.205 ; 274.175,26.193 277.444,26.193 ; 274.175,26.193 277.444,26.193 ; 274.175,26.193 274.175,29.286 ; 274.175,26.193 274.175,29.286 ; 274.175,29.286 277.444,29.286 ; 274.175,29.286 277.444,29.286 ; 274.183,7.23 274.183,10.323 ; 274.183,7.23 274.183,10.323 ; 274.183,7.23 277.452,7.23 ; 274.183,7.23 277.452,7.23 ; 274.183,10.323 277.452,10.323 ; 274.183,10.323 277.452,10.323 ; 277.444,26.193 277.444,29.286 ; 277.444,26.193 277.444,29.286 ; 277.452,7.23 277.452,10.323 ; 277.452,7.23 277.452,10.323 ; 293.149,64.24 296.418,64.24 ; 293.149,64.24 296.418,64.24 ; 293.149,64.24 293.149,67.332 ; 293.149,64.24 293.149,67.332 ; 293.149,67.332 296.418,67.332 ; 293.149,67.332 296.418,67.332 ; 293.149,83.29 296.418,83.29 ; 293.149,83.29 296.418,83.29 ; 293.149,83.29 293.149,86.382 ; 293.149,83.29 293.149,86.382 ; 293.149,86.382 296.418,86.382 ; 293.149,86.382 296.418,86.382 ; 293.165,45.265 296.433,45.265 ; 293.165,45.265 296.433,45.265 ; 293.165,45.265 293.165,48.357 ; 293.165,45.265 293.165,48.357 ; 293.165,48.357 296.433,48.357 ; 293.165,48.357 296.433,48.357 ; 293.183,7.23 296.452,7.23 ; 293.183,7.23 296.452,7.23 ; 293.183,7.23 293.183,10.323 ; 293.183,7.23 293.183,10.323 ; 293.183,10.323 296.452,10.323 ; 293.183,10.323 296.452,10.323 ; 293.188,26.254 296.456,26.254 ; 293.188,26.254 296.456,26.254 ; 293.188,26.254 293.188,29.346 ; 293.188,26.254 293.188,29.346 ; 293.188,29.346 296.456,29.346 ; 293.188,29.346 296.456,29.346 ; 296.418,64.24 296.418,67.332 ; 296.418,64.24 296.418,67.332 ; 296.418,83.29 296.418,86.382 ; 296.418,83.29 296.418,86.382 ; 296.433,45.265 296.433,48.357 ; 296.433,45.265 296.433,48.357 ; 296.452,7.23 296.452,10.323 ; 296.452,7.23 296.452,10.323 ; 296.456,26.254 296.456,29.346 ; 296.456,26.254 296.456,29.346 ; -84.085,-124.34 217.715,-124.34 217.715,-122.74 -84.085,-122.74 -84.085,-124.34 ; -84.085,-98.4 ccw(c-82.085,-98.4) -82.085,-100.4 -5.518,-100.4 cw(c-4.555,-99.25) -3.592,-100.4 72.315,-100.4 72.315,-93.4 88.315,-93.4 88.315,-100.4 94.482,-100.4 cw(c95.445,-99.25) 96.408,-100.4 215.715,-100.4 ccw(c215.715,-98.4) 217.715,-98.4 217.715,-10.1 ccw(c215.715,-10.1) 215.715,-8.1 -82.085,-8.1 ccw(c-82.085,-10.1) -84.085,-10.1 -84.085,-98.4 ; -72.785,-11.85 ccw(c-72.285,-11.85) -71.785,-11.85 -71.785,-10.35 ccw(c-72.285,-10.35) -72.785,-10.35 -72.785,-11.85 ; -70.805,-13.78 ccw(c-70.505,-13.78) -70.205,-13.78 -70.205,-12.98 ccw(c-70.505,-12.98) -70.805,-12.98 -70.805,-13.78 ; -70.805,-9.46 ccw(c-70.505,-9.46) -70.205,-9.46 -70.205,-8.85 ccw(c-70.505,-8.85) -70.805,-8.85 -70.805,-9.46 ; -70.385,-121.44 ccw(c-69.385,-121.44) -69.385,-122.44 -62.985,-122.44 ccw(c-62.985,-121.44) -61.985,-121.44 -61.985,-120.74 ccw(c-62.985,-120.74) -62.985,-119.74 -69.385,-119.74 ccw(c-69.385,-120.74) -70.385,-120.74 -70.385,-121.44 ; -69.185,-121.39 -63.185,-121.39 -63.185,-120.79 -69.185,-120.79 -69.185,-121.39 ; -62.165,-13.78 ccw(c-61.865,-13.78) -61.565,-13.78 -61.565,-12.98 ccw(c-61.865,-12.98) -62.165,-12.98 -62.165,-13.78 ; -62.165,-9.46 ccw(c-61.865,-9.46) -61.565,-9.46 -61.565,-8.85 ccw(c-61.865,-8.85) -62.165,-8.85 -62.165,-9.46 ; -61.135,-27.25 ccw(c-58.735,-27.25) -56.335,-27.25 -56.335,-26.25 ccw(c-58.735,-26.25) -61.135,-26.25 -61.135,-27.25 ; -60.991,-146.581 ccw(c-60.491,-146.581) -59.991,-146.581 -59.991,-145.081 ccw(c-60.491,-145.081) -60.991,-145.081 -60.991,-146.581 ; -60.585,-11.85 ccw(c-60.085,-11.85) -59.585,-11.85 -59.585,-10.35 ccw(c-60.085,-10.35) -60.585,-10.35 -60.585,-11.85 ; -58.891,-148.731 -49.891,-148.731 -49.891,-141.331 -58.891,-141.331 -58.891,-148.731 ; -49.341,-161.981 ccw(c-46.941,-161.981) -44.541,-161.981 -44.541,-160.981 ccw(c-46.941,-160.981) -49.341,-160.981 -49.341,-161.981 ; -48.791,-146.581 ccw(c-48.291,-146.581) -47.791,-146.581 -47.791,-145.081 ccw(c-48.291,-145.081) -48.791,-145.081 -48.791,-146.581 ; -40.075,-85.25 ccw(c-37.675,-85.25) -35.275,-85.25 -35.275,-84.25 ccw(c-37.675,-84.25) -40.075,-84.25 -40.075,-85.25 ; -35.33,-47.25 ccw(c-32.93,-47.25) -30.53,-47.25 -30.53,-46.25 ccw(c-32.93,-46.25) -35.33,-46.25 -35.33,-47.25 ; -28.281,-219.981 ccw(c-25.881,-219.981) -23.481,-219.981 -23.481,-218.981 ccw(c-25.881,-218.981) -28.281,-218.981 -28.281,-219.981 ; -23.536,-181.981 ccw(c-21.136,-181.981) -18.736,-181.981 -18.736,-180.981 ccw(c-21.136,-180.981) -23.536,-180.981 -23.536,-181.981 ; -14.43,-64.55 cw(c-14.43,-63.05) -14.43,-61.55 -13.43,-61.55 cw(c-13.43,-63.05) -13.43,-64.55 -14.43,-64.55 ; -2.636,-199.281 cw(c-2.636,-197.781) -2.636,-196.281 -1.636,-196.281 cw(c-1.636,-197.781) -1.636,-199.281 -2.636,-199.281 ; -2.085,-27.25 ccw(c0.315,-27.25) 2.715,-27.25 2.715,-26.25 ccw(c0.315,-26.25) -2.085,-26.25 -2.085,-27.25 ; 9.709,-161.981 ccw(c12.109,-161.981) 14.509,-161.981 14.509,-160.981 ccw(c12.109,-160.981) 9.709,-160.981 9.709,-161.981 ; 14.666,92.265 ccw(c14.966,92.265) 15.266,92.265 15.266,93.065 ccw(c14.966,93.065) 14.666,93.065 14.666,92.265 ; 14.666,96.585 ccw(c14.966,96.585) 15.266,96.585 15.266,97.195 ccw(c14.966,97.195) 14.666,97.195 14.666,96.585 ; 21.449,-200.381 24.449,-200.381 ccw(c26.409,-199.981) 26.009,-201.941 26.009,-204.941 26.809,-204.941 26.809,-201.941 ccw(c26.409,-199.981) 28.369,-200.381 31.369,-200.381 31.369,-199.581 28.369,-199.581 ccw(c26.409,-199.981) 24.449,-199.581 21.449,-199.581 21.449,-200.381 ; 23.306,92.265 ccw(c23.606,92.265) 23.906,92.265 23.906,93.065 ccw(c23.606,93.065) 23.306,93.065 23.306,92.265 ; 23.306,96.585 ccw(c23.606,96.585) 23.906,96.585 23.906,97.195 ccw(c23.606,97.195) 23.306,97.195 23.306,96.585 ; 24.336,78.795 ccw(c26.736,78.795) 29.136,78.795 29.136,79.795 ccw(c26.736,79.795) 24.336,79.795 24.336,78.795 ; 45.396,20.795 ccw(c47.796,20.795) 50.196,20.795 50.196,21.795 ccw(c47.796,21.795) 45.396,21.795 45.396,20.795 ; 50.141,58.795 ccw(c52.541,58.795) 54.941,58.795 54.941,59.795 ccw(c52.541,59.795) 50.141,59.795 50.141,58.795 ; 71.041,41.495 cw(c71.041,42.995) 71.041,44.495 72.041,44.495 cw(c72.041,42.995) 72.041,41.495 71.041,41.495 ; 78.449,-200.381 81.449,-200.381 ccw(c83.409,-199.981) 83.009,-201.941 83.009,-204.941 83.809,-204.941 83.809,-201.941 ccw(c83.409,-199.981) 85.369,-200.381 88.369,-200.381 88.369,-199.581 85.369,-199.581 ccw(c83.409,-199.981) 81.449,-199.581 78.449,-199.581 78.449,-200.381 ; 83.386,78.795 ccw(c85.786,78.795) 88.186,78.795 88.186,79.795 ccw(c85.786,79.795) 83.386,79.795 83.386,78.795 ; 110.649,-219.381 113.649,-219.381 ccw(c115.609,-218.981) 115.209,-220.941 115.209,-223.941 116.009,-223.941 116.009,-220.941 ccw(c115.609,-218.981) 117.569,-219.381 120.569,-219.381 120.569,-218.581 117.569,-218.581 ccw(c115.609,-218.981) 113.649,-218.581 110.649,-218.581 110.649,-219.381 ; 130.915,-27.25 ccw(c133.315,-27.25) 135.715,-27.25 135.715,-26.25 ccw(c133.315,-26.25) 130.915,-26.25 130.915,-27.25 ; 137.57,-64.55 cw(c137.57,-63.05) 137.57,-61.55 138.57,-61.55 cw(c138.57,-63.05) 138.57,-64.55 137.57,-64.55 ; 142.709,-161.981 ccw(c145.109,-161.981) 147.509,-161.981 147.509,-160.981 ccw(c145.109,-160.981) 142.709,-160.981 142.709,-161.981 ; 149.364,-199.281 cw(c149.364,-197.781) 149.364,-196.281 150.364,-196.281 cw(c150.364,-197.781) 150.364,-199.281 149.364,-199.281 ; 154.67,-47.25 ccw(c157.07,-47.25) 159.47,-47.25 159.47,-46.25 ccw(c157.07,-46.25) 154.67,-46.25 154.67,-47.25 ; 164.084,-200.731 164.084,-197.231 173.134,-197.231 173.134,-200.731 164.084,-200.731 ; 166.464,-181.981 ccw(c168.864,-181.981) 171.264,-181.981 171.264,-180.981 ccw(c168.864,-180.981) 166.464,-180.981 166.464,-181.981 ; 167.859,-199.731 167.859,-198.231 169.359,-198.231 169.359,-199.731 167.859,-199.731 ; 178.415,-85.25 ccw(c180.815,-85.25) 183.215,-85.25 183.215,-84.25 ccw(c180.815,-84.25) 178.415,-84.25 178.415,-85.25 ; 179.165,-122.54 179.165,-121.44 180.465,-121.44 180.465,-122.54 179.165,-122.54 ; 181.509,-165.331 181.509,-156.331 187.009,-156.331 187.009,-165.331 181.509,-165.331 ; 187.009,-161.031 188.009,-161.031 188.009,-160.631 187.009,-160.631 187.009,-161.031 ; 187.009,-159.781 188.009,-159.781 188.009,-159.381 187.009,-159.381 187.009,-159.781 ; 188.209,-205.381 188.209,-202.581 195.009,-202.581 195.009,-205.381 188.209,-205.381 ; 190.209,-219.981 ccw(c192.609,-219.981) 195.009,-219.981 195.009,-218.981 ccw(c192.609,-218.981) 190.209,-218.981 190.209,-219.981 ; 196.915,-27.25 ccw(c199.315,-27.25) 201.715,-27.25 201.715,-26.25 ccw(c199.315,-26.25) 196.915,-26.25 196.915,-27.25 ; 198.026,83.163 201.295,83.163 201.295,86.255 198.026,86.255 198.026,83.163 ; 208.709,-161.981 ccw(c211.109,-161.981) 213.509,-161.981 213.509,-160.981 ccw(c211.109,-160.981) 208.709,-160.981 208.709,-161.981 ; 216.386,78.795 ccw(c218.786,78.795) 221.186,78.795 221.186,79.795 ccw(c218.786,79.795) 216.386,79.795 216.386,78.795 ; 217.076,83.163 220.345,83.163 220.345,86.255 217.076,86.255 217.076,83.163 ; 223.041,41.495 cw(c223.041,42.995) 223.041,44.495 224.041,44.495 cw(c224.041,42.995) 224.041,41.495 223.041,41.495 ; 236.126,83.163 239.395,83.163 239.395,86.255 236.126,86.255 236.126,83.163 ; 240.141,58.795 ccw(c242.541,58.795) 244.941,58.795 244.941,59.795 ccw(c242.541,59.795) 240.141,59.795 240.141,58.795 ; 244.725,-190.322 252.725,-190.322 252.725,-185.322 244.725,-185.322 244.725,-190.322 ; 244.725,-181.322 252.725,-181.322 252.725,-176.322 244.725,-176.322 244.725,-181.322 ; 244.725,-172.322 252.725,-172.322 252.725,-167.322 244.725,-167.322 244.725,-172.322 ; 244.725,-163.322 252.725,-163.322 252.725,-158.322 244.725,-158.322 244.725,-163.322 ; 244.725,-154.322 252.725,-154.322 252.725,-149.322 244.725,-149.322 244.725,-154.322 ; 263.886,20.795 ccw(c266.286,20.795) 268.686,20.795 268.686,21.795 ccw(c266.286,21.795) 263.886,21.795 263.886,20.795 ; 264.574,83.163 267.843,83.163 267.843,86.255 264.574,86.255 264.574,83.163 ; 282.386,78.795 ccw(c284.786,78.795) 287.186,78.795 287.186,79.795 ccw(c284.786,79.795) 282.386,79.795 282.386,78.795
  text "1.60" at 265.867,-113.203 h5
  text "TYPE-C}" at -57.612,-139.839 h2 r180
  text "绿色线框为PCB板框}" at 255.88,-147.46 h6
  text "电池端子}" at 179.59,-154.802 h2 r180
  text "粉红色线框内禁止布元器件}" at 255.88,-156.46 h6
  text "天蓝色线框内禁止布线路和元器件}" at 255.88,-165.46 h6
  text "红色线框为LED灯}" at 255.88,-174.46 h6
  text "深蓝色线框为端子}" at 255.88,-183.46 h6
  text "ON 拔动开关 OFF}" at 183.408,-201.093 h2 r180
  text "TGK330-共PCB板-20230226}" at 3.747,-253.74 h8

## Other copper
Top:
  pour cut-out: 71.545,16.886 90.722,16.886 90.722,10.282 90.595,10.155 71.418,10.155 71.418,16.759
Bottom:
  pour cut-out: 71.628,16.891 90.805,16.891 90.805,10.287 90.678,10.16 71.501,10.16 71.501,16.764
  region net CHRG_IN: 73.047,12.192 73.047,10.992 77.547,10.992 77.547,13.392 78.547,13.392 78.547,10.992 80.747,10.992 80.747,13.392 81.747,13.392 81.747,10.992 83.947,10.992 83.947,13.392 84.947,13.392 84.947,10.992 89.891,10.992 89.891,11.592 85.547,11.592 85.547,13.992 83.347,13.992 83.347,11.592 82.347,11.592 82.347,13.992 80.147,13.992 80.147,11.592 79.147,11.592 79.147,13.992 76.947,13.992 76.947,12.192 73.047,12.192

## Silkscreen, mask and mechanical layers (free items; w line width, h text height)
Silkscreen Bottom:
  lines w0.013: 237.762,40.051 237.762,43.551 246.812,43.551 246.812,40.051 237.762,40.051 ; 241.537,41.051 241.537,42.551 243.037,42.551 243.037,41.051 241.537,41.051
Assembly Drawing Top:
  circle w0.006: c470.126,-258.912 r0.003
  circle w0.006: c470.126,-248.609 r0.003
  circle w0.006: c468.526,-248.609 r0.003
  circle w0.006: c443.009,-156.309 r0.003
  circle w0.006: c432.377,-156.309 r0.003
  circle w0.006: c432.377,-248.609 r0.003
  circle w0.006: c132.577,-258.912 r0.003
  circle w0.006: c132.577,-246.609 r0.003
  circle w0.006: c434.377,-246.609 r0.003
  circle w0.006: c1.259,7.391 r0.003
  circle w0.006: c301.059,97.691 r0.003
  circle w0.006: c303.059,7.391 r0.003